# Altium PCB IO.PcbDoc
Units mm, origin at the board's own origin, x right, y up, seen from the top; angles counter-clockwise.
Board outline 19 x 13 mm, 2 copper layers (Top Layer, Bottom Layer); 13 components, 16 nets, 48 pads, 85 vias.
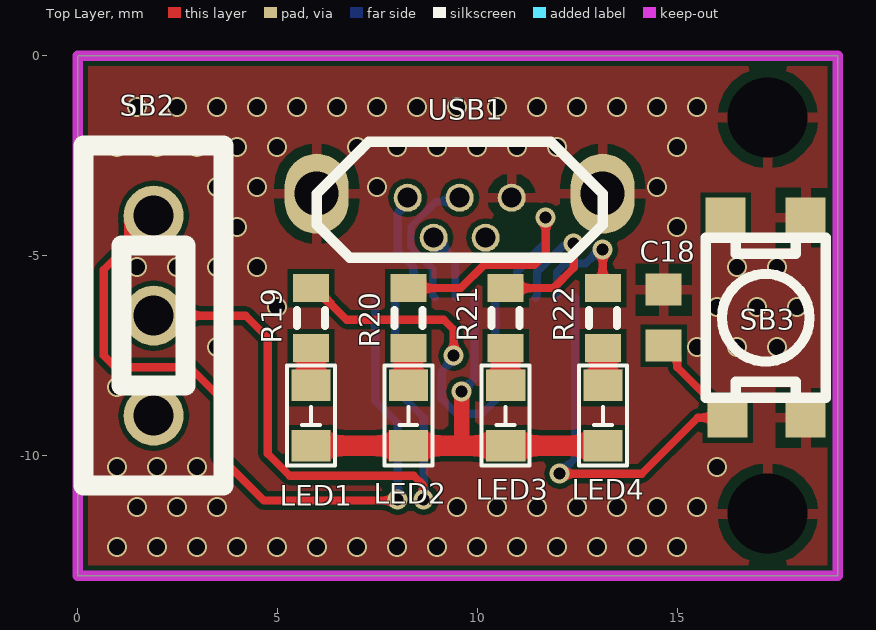
[diagram p0: Top Layer view]
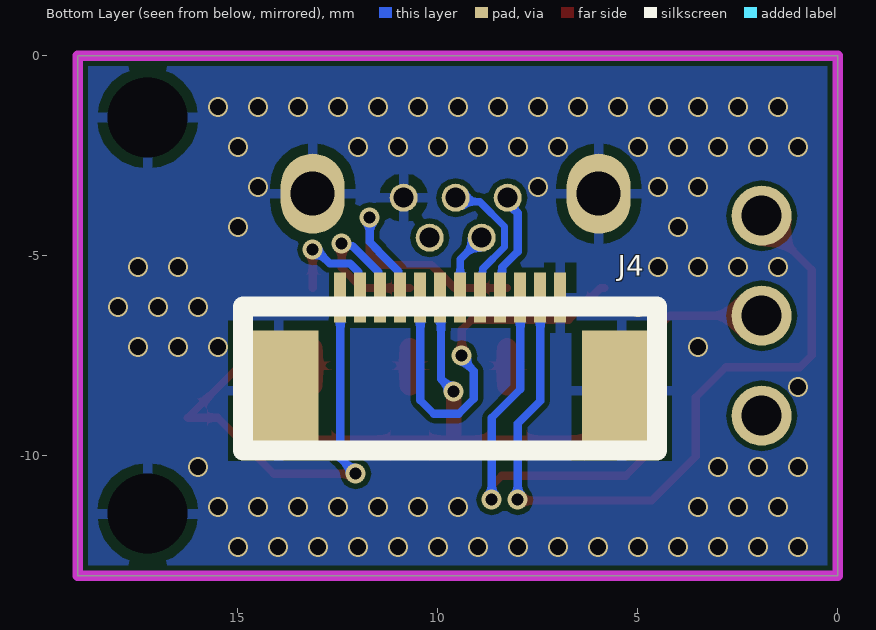
[diagram p1: Bottom Layer view, seen from below]

## Layer stack, top to bottom
Top Solder: solder mask 0.0102, Solder Resist, Dk 3.5
Top Layer: signal copper 0.0356
Dielectric 1: dielectric 0.32, FR-4, Dk 4.8
Bottom Layer: signal copper 0.0356
Bottom Solder: solder mask 0.0102, Solder Resist, Dk 3.5

## Board outline
0,-13 0,0 19,0 19,-13

## Design rules (kind name [scope] priority, off if disabled: settings)
Clearance [All] p1: gap=0.127 ignorepadtopadclearanceinfootprint=FALSE
PolygonConnect [All] p1: connectstyle=Relief reliefconductorwidth=0.254 reliefentries=4 polygonreliefangle="90 Angle" airgapwidth=0.254
RoutingVias [All] p1: holewidth=0.711 width=1.27 viastyle="Through Hole" minholewidth=0.3 minwidth=0.5 maxholewidth=0.711 maxwidth=1.27
SolderMaskExpansion [All] p1: expansion=0.102
Width [All] p1: maxlimit=1.016 minlimit=0.178 preferedwidth=0.254
30 further rules are at their usual default settings.

## Components (designator, comment, footprint, x,y, rotation, side; value= is the part's Value field where it differs from the comment)
C18 "Cap Semi" 1608[0603] 14.65,-6.55 r270 top value=100pF
J4 "Plug8" FPC0.5-12PS 12.437,-6.05 r180 bottom
LED1 "LED" SMD-0603_LED 5.833,-9.75 r90 top
LED2 "LED" SMD-0603_LED 8.267,-9.75 r90 top
LED3 "LED" SMD-0603_LED 10.7,-9.75 r90 top
LED4 "LED" SMD-0603_LED 13.133,-9.75 r90 top
R19 "Res3" J1-0603 5.833,-6.56 r270 top value=1K
R20 "Res3" J1-0603 8.267,-6.56 r270 top value=1K
R21 "Res3" J1-0603 10.7,-6.56 r270 top value=1K
R22 "Res3" J1-0603 13.133,-6.56 r270 top value=1K
SB2 "SPDT" "Slide_switch 3.5*8.5" 0.15,-10.75 r90 top
SB3 "SPST" "TACK-SW_SMD 2P 4x3mm_2" 15.7,-4.55 r0 top
USB1 "Micro/Mini" USB_Micro-B_S_DIP_180 8.25,-4.55 r0 top

## Footprints (in the part's own frame and the unit in brackets; to place one, negate y for a bottom-side part, rotate by r counter-clockwise, add the part's x,y. Pads: shape width x height; smd on the part's side, far side on the other; paste and mask are expansions set on the pad)
1608[0603] [mm] "Chip Capacitor, Body 1.6x0.8mm, IPC High Density"
  rect 0.8x0.9 smd: 1(-0.7,0) 2(0.7,0)
  body extent -0.87,-0.48 0.87,0.48, height 1.3
FPC0.5-12PS [mm]
  rect 0.3x1.25 smd: 1(0,0) 2(0.5,0) 3(1,0) 4(1.5,0) 5(2,0) 6(2.5,0) 7(3,0) 8(3.5,0) 9(4,0) 10(4.5,0) 11(5,0) 12(5.5,0)
  rect 2x3 smd: ""(-1.54,-2.325) ""(7.04,-2.325)
  silkscreen extent -2.43,-3.82 7.92,-0.22
J1-0603 [mm] "Chip Resistor, Body 1.6x0.8mm, IPC High Density"
  rect 0.7x0.9 smd: 1(-0.75,0) 2(0.75,0)
  silkscreen extent -0.2,-0.35 0.2,0.35, body extent -0.85,-0.48 0.85,0.48, height 0.9
"Slide_switch 3.5*8.5" [mm]
  round 1.5 hole 1: 1(1.75,-1.75) 2(4.25,-1.75) 3(6.75,-1.75)
  silkscreen extent 0,-3.5 8.5,0
SMD-0603_LED [mm]
  rect 0.78x0.98 smd: 1(0,0) 2(1.51,0)
  silkscreen extent -0.5,-0.6 2,0.6
"TACK-SW_SMD 2P 4x3mm_2" [mm]
  rect 1x1 smd: 1(0.5,0.5) 1(0.55,-4.5) 2(2.5,-4.5) 2(2.5,0.5)
  silkscreen extent 0,-4 3,0
USB_Micro-B_S_DIP_180 [mm]
  round 0.7 hole 0.5: 1(0,1) 2(0.65,0) 3(1.3,1) 4(1.95,0) 5(2.6,1)
  oval 1.6x2 hole 1.1: ""(-2.275,1.1) ""(4.875,1.1)
  silkscreen extent -2.28,-0.5 4.87,2.4

## Part data
C18: "Capacitor (Semiconductor SIM Model)", LatestRevisionDate=29-May-2009, LatestRevisionNote="IPC-7351 Footprint Added.", PackageDescription="Chip Capacitor", PackageReference=C1206, Published=8-Jun-2000, Publisher="Altium Limited"
J4: library part Plug12
R19 R20 R21 R22: "Resistor", LatestRevisionDate=29-May-2009, LatestRevisionNote="IPC-7351 Footprint Added.", PackageDescription="Chip Resistor", PackageReference=J1-0603, Published=8-Jun-2000, Publisher="Altium Limited"
SB2: library part Switch_Button2
SB3: library part Switch_Button1
USB1: library part USB2

## Free pads (board coordinates)
  round 0 hole 2: ""(17.25,-11.45) ""(17.25,-1.55)

## Via types
v1: diameter 0.5, hole 0.4, Top Layer to Bottom Layer, tented both sides, 77 vias
v2: diameter 0.5/0.5 (per signal layer), hole 0.3, Top Layer to Bottom Layer, tented both sides, 8 vias

## Nets (pads, with @x,y where several pads share a name; then routed paths per layer and width w, separated by ;. In a path a pad name is that pad's centre, name@x,y a point inside that pad or via, vN(x,y) a via of type N, cw(c..) or ccw(c..) an arc to the next point about the centre after c; other vN are vias at no path point)
button: C18.2 J4.1 SB3.1@16.25,-9.05 | length 11.8
  Top Layer w0.203: v2(12.05,-10.45) 14.1,-10.45 15.5,-9.05 16.25,-9.05 14.987,-7.787 14.987,-7.548 14.689,-7.25 C18.2
  Bottom Layer w0.203: v2(12.05,-10.45) 12.437,-10.063 J4.1
D+: J4.8 USB1.3 | length 3.5
  Bottom Layer w0.178: J4.8 8.876,-5.989 8.876,-5.326 8.334,-4.784 8.334,-4.266 8.95,-3.65 9.45,-3.65 USB1.3
D-: J4.7 USB1.2 | length 1.7
  Bottom Layer w0.178: USB1.2 9.437,-5.087 J4.7
GND: C18.1 J4. J4.12 pad. SB3.2 USB1. USB1.5
  other v1: 0.987,-12.279 1.987,-12.279 2.987,-12.279 3.987,-12.279 4.987,-12.279 5.987,-12.279 6.987,-12.279 7.987,-12.279 8.987,-12.279 9.987,-12.279 10.987,-12.279 11.987,-12.279 12.987,-12.279 13.987,-12.279 14.987,-12.279 1.487,-11.279 2.487,-11.279 3.487,-11.279 9.487,-11.279 10.487,-11.279 11.487,-11.279 12.487,-11.279 13.487,-11.279 14.487,-11.279 15.487,-11.279 0.987,-10.279 1.987,-10.279 2.987,-10.279 15.987,-10.279 0.987,-8.279 3.487,-7.279 15.487,-7.279 16.487,-7.279 17.487,-7.279 4.987,-6.279 15.987,-6.279 16.987,-6.279 17.987,-6.279 1.487,-5.279 2.487,-5.279 3.487,-5.279 4.487,-5.279 16.487,-5.279 17.487,-5.279 3.987,-4.279 14.987,-4.279 3.487,-3.279 4.487,-3.279 7.487,-3.279 14.487,-3.279 0.987,-2.279 1.987,-2.279 2.987,-2.279 3.987,-2.279 4.987,-2.279 6.987,-2.279 7.987,-2.279 8.987,-2.279 9.987,-2.279 10.987,-2.279 11.987,-2.279 14.987,-2.279 1.487,-1.279 2.487,-1.279 3.487,-1.279 4.487,-1.279 5.487,-1.279 6.487,-1.279 7.487,-1.279 8.487,-1.279 9.487,-1.279 10.487,-1.279 11.487,-1.279 12.487,-1.279 13.487,-1.279 14.487,-1.279 15.487,-1.279
LED1: J4.5 R19.1 | length 10
  Top Layer w0.203: R19.1 5.933,-5.81 6.723,-6.6 9.15,-6.6 9.4,-6.85 v2(9.4,-7.5)
  Bottom Layer w0.203: v2(9.4,-7.5) 9.4,-7.58 9.1,-7.88 9.1,-8.577 9.473,-8.95 10.1,-8.95 10.437,-8.613 J4.5
LED2: J4.4 R20.1 | length 7
  Top Layer w0.203: R20.1 9.577,-5.81 10.155,-5.231 11.419,-5.231 11.7,-4.95 v2(11.7,-4.05)
  Bottom Layer w0.203: J4.4 10.985,-6.002 10.985,-5.391 11.479,-4.898 11.479,-4.878 11.7,-4.657 v2(11.7,-4.05)
LED3: J4.3 R21.1 | length 4.4
  Top Layer w0.203: R21.1 11.89,-5.81 12.4,-5.3 v2(12.4,-4.7)
  Bottom Layer w0.203: J4.3 11.485,-6.002 11.485,-5.403 12.132,-4.757 12.343,-4.757 v2(12.4,-4.7)
LED4: J4.2 R22.1 | length 2.9
  Top Layer w0.203: v2@13.125,-4.95 13.125,-5.802 R22.1
  Bottom Layer w0.203: J4.2 11.985,-6.002 11.985,-5.403 12.195,-5.194 12.701,-5.194 13.045,-4.85 v2(13.125,-4.85)
NetLED1_2: LED1.2 R19.2 | length 0.9
  Top Layer w0.508: LED1.2 R19.2
NetLED2_2: LED2.2 R20.2 | length 0.9
  Top Layer w0.508: LED2.2 R20.2
NetLED3_2: LED3.2 R21.2 | length 0.9
  Top Layer w0.508: LED3.2 R21.2
NetLED4_2: LED4.2 R22.2 | length 0.9
  Top Layer w0.508: LED4.2 R22.2
SW_EN1: J4.10 SB2.2 | length 15.9
  Top Layer w0.203: SB2.2 4.2,-6.5 4.75,-7.05 4.75,-9.95 5.3,-10.5 8.4,-10.5 8.636,-10.736 8.636,-11.086 v2(8.65,-11.1)
  Bottom Layer w0.203: J4.10 7.937,-8.337 8.65,-9.05 v2(8.65,-11.1)
SW_EN2: J4.11 SB2.3 | length 19
  Top Layer w0.203: SB2.3 1.9,-4.1 0.65,-5.35 0.65,-7.498 0.939,-7.787 2.8,-7.787 3.55,-8.537 3.55,-10.023 4.65,-11.123 7.977,-11.123 v2(8,-11.1)
  Bottom Layer w0.203: J4.11 7.437,-8.634 8,-9.197 v2(8,-11.1)
V_USB: J4.9 USB1.1 | length 2.8
  Bottom Layer w0.203: USB1.1 8.25,-3.684 8,-3.934 8,-4.899 8.389,-5.288 8.389,-6.002 J4.9
VCC: J4.6 LED1.1 LED2.1 LED3.1 LED4.1 | length 11.2
  Top Layer w0.203: 9.55,-9.75 9.6,-9.7
  Top Layer w0.381: 9.6,-9.7 v2(9.6,-8.4)
  Top Layer w0.508: LED1.1 LED2.1 9.55,-9.75 LED3.1 LED4.1
  Bottom Layer w0.203: v2(9.6,-8.4) 9.919,-8.081 9.919,-6.068 J4.6
pads on no net: SB2.1 SB3.1@16.2,-4.05 USB1.4

## Polygon pours and split planes (outlines as drawn)
GND on Top Layer (solid, pour order 14): 0,0 19,0 19,-13 0,-13
GND on Bottom Layer (solid, pour order 16): 0,0 19,0 19,-13 0,-13

## Keep-outs
Keep-Out Layer:
  the board outline again, w0.254